# Altium PCB GCM_PCB.PcbDoc
Units mm, origin at the board's own origin, x right, y up, seen from the top; angles counter-clockwise.
Board outline 60 x 96 mm, 2 copper layers (Top Layer, Bottom Layer); 63 components, 57 nets, 301 pads, 0 vias.
Unrouted connection lines stored in the file: 174.
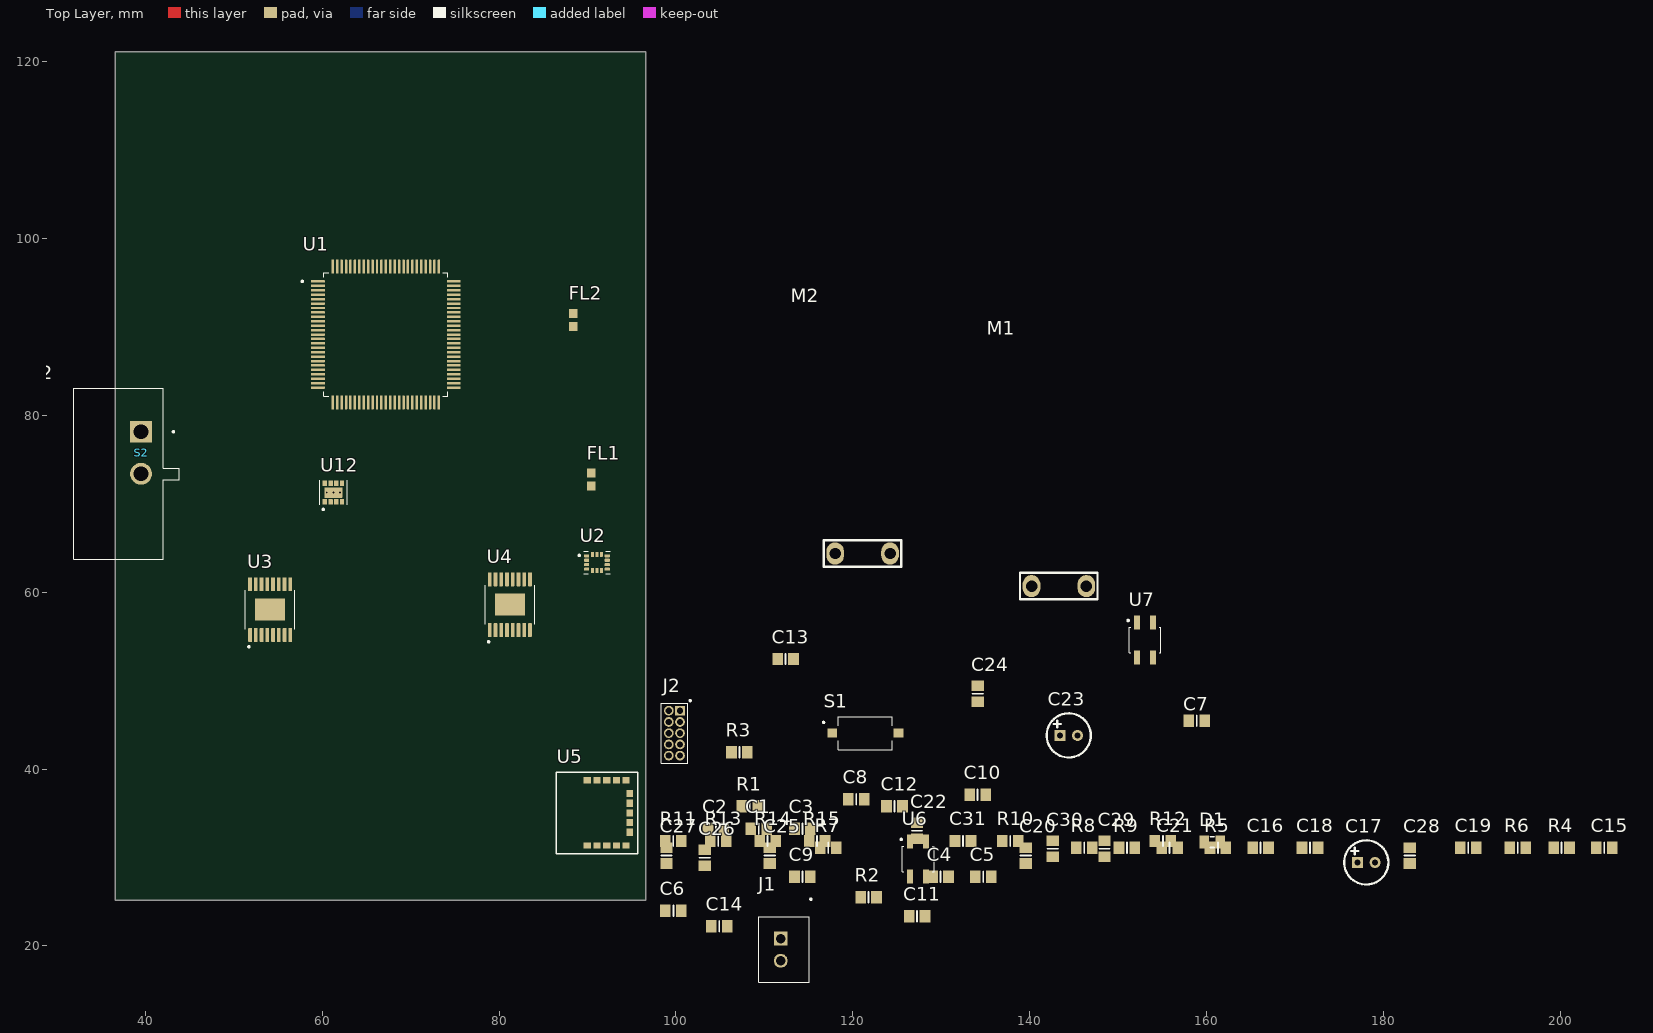
[diagram p0: Top Layer view]
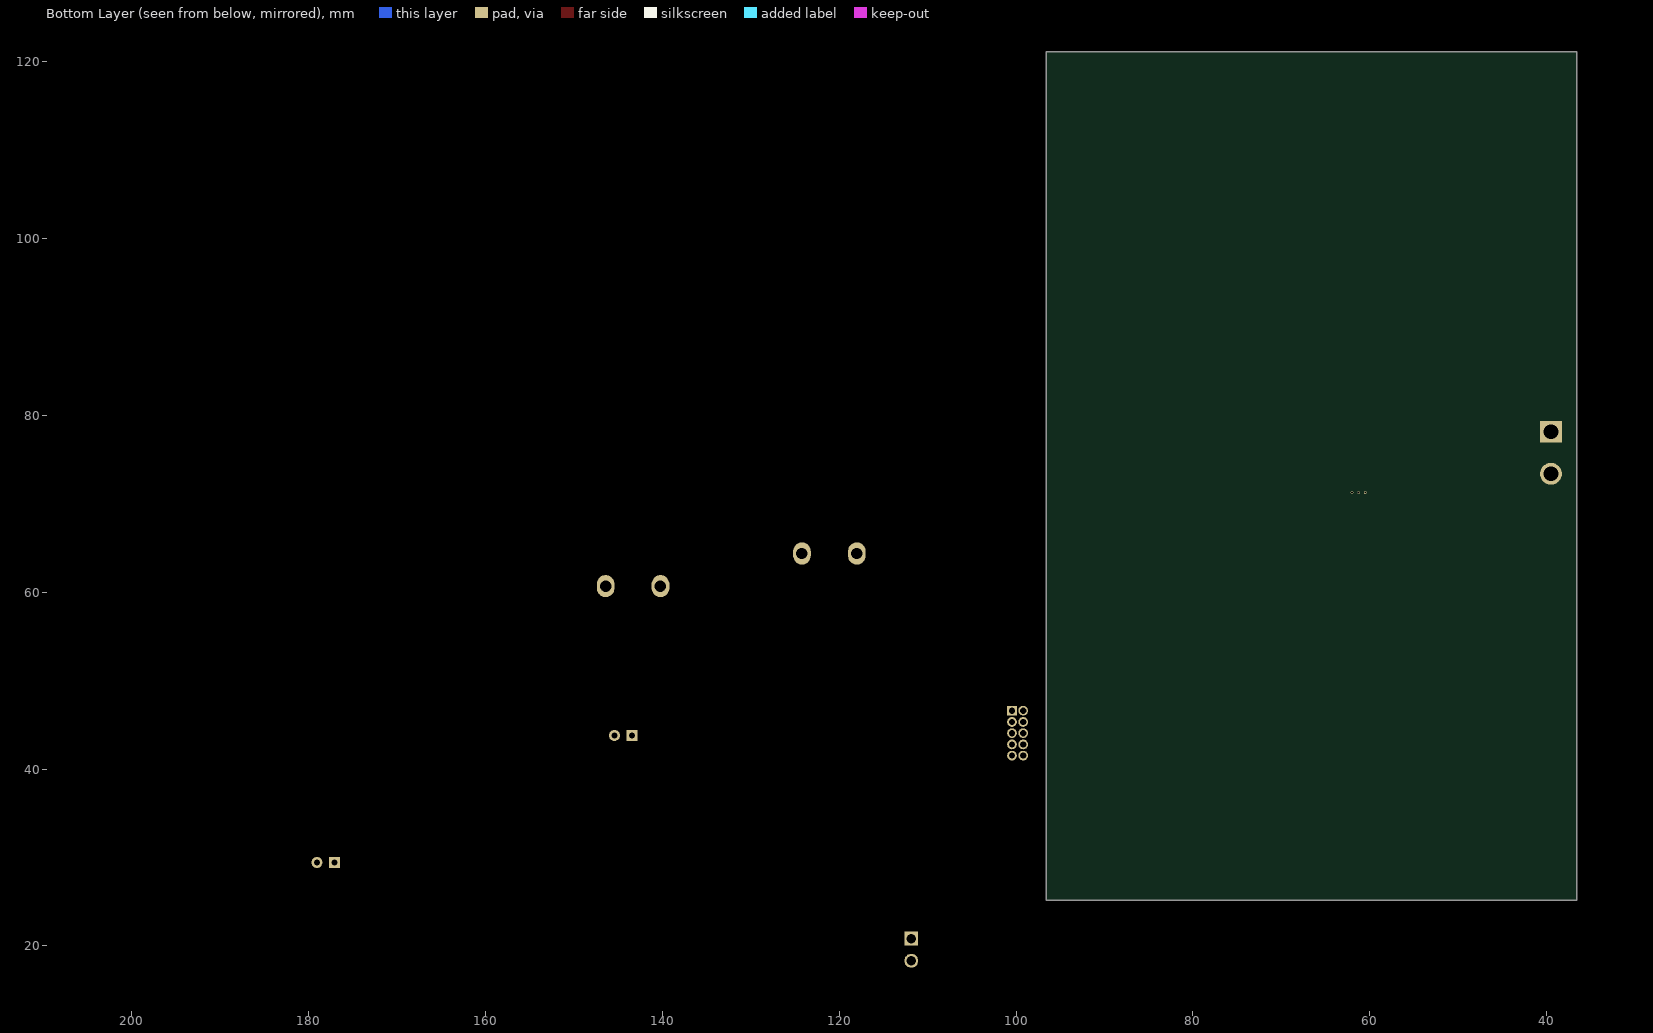
[diagram p1: Bottom Layer view, seen from below]

## Layer stack, top to bottom
Top Solder: solder mask 0.0102, Solder Resist, Dk 3.5
Top Layer: signal copper 0.0356
Dielectric 1: dielectric 0.32, FR-4, Dk 4.8
Bottom Layer: signal copper 0.0356
Bottom Solder: solder mask 0.0102, Solder Resist, Dk 3.5

## Board outline
36.576,25.146 36.576,121.146 96.576,121.146 96.576,25.146

## Design rules (kind name [scope] priority, off if disabled: settings)
Clearance [All] p1: gap=0.15 ignorepadtopadclearanceinfootprint=FALSE
PolygonConnect [All] p1: connectstyle=Relief reliefconductorwidth=0.254 reliefentries=4 polygonreliefangle="90 Angle" airgapwidth=0.254
RoutingVias [All] p1: holewidth=0.711 width=1.27 viastyle="Through Hole" minholewidth=0.711 minwidth=1.27 maxholewidth=0.711 maxwidth=1.27
SolderMaskExpansion [All] p1: expansion=0.102 istentingtop=FALSE
Width [All] p1: maxlimit=0.254 minlimit=0.254 preferedwidth=0.254
30 further rules are at their usual default settings.

## Components (designator, comment, footprint, x,y, rotation, side; value= is the part's Value field where it differs from the comment)
C1 "100nF" "CAPACITOR TANTALIO" 109.347,33.274 r0 top
C2 "1uF" "CAPACITOR TANTALIO" 104.521,33.274 r0 top
C3 "100nF" "CAPACITOR TANTALIO" 114.3,33.274 r0 top
C4 "2.2uF" "CAPACITOR TANTALIO" 129.921,27.813 r0 top
C5 "2.2uF" "CAPACITOR TANTALIO" 134.747,27.813 r0 top
C6 "100nF" "CAPACITOR TANTALIO" 99.706,24.003 r0 top
C7 "100nF" "CAPACITOR TANTALIO" 158.888,45.466 r0 top
C8 "100nF" "CAPACITOR TANTALIO" 120.385,36.576 r0 top
C9 "100nF" "CAPACITOR TANTALIO" 114.3,27.813 r0 top
C10 "100nF" "CAPACITOR TANTALIO" 134.112,37.084 r0 top
C11 "4.7uF" "CAPACITOR TANTALIO" 127.265,23.368 r0 top
C12 "3.3uF" "CAPACITOR TANTALIO" 124.714,35.814 r0 top
C13 "10uF" "CAPACITOR TANTALIO" 112.395,52.451 r0 top
C14 "22uF" "CAPACITOR TANTALIO" 104.891,22.225 r0 top
C15 "22nF" "CAPACITOR TANTALIO" 204.978,31.115 r0 top
C16 "100nF" "CAPACITOR TANTALIO" 166.116,31.115 r0 top
C17 "100 uF/16V" "Cap El 10uF" 115.57,91.948 r0 top
C18 "100nF" "CAPACITOR TANTALIO" 171.704,31.115 r0 top
C19 "100nF" "CAPACITOR TANTALIO" 189.611,31.115 r0 top
C20 "100nF" "CAPACITOR TANTALIO" 139.573,30.226 r90 top
C21 "22nF" "CAPACITOR TANTALIO" 155.829,31.115 r0 top
C22 "100nF" "CAPACITOR TANTALIO" 127.254,33.031 r90 top
C23 "100 uF/16V" "Cap El 10uF" 81.915,106.315 r0 top
C24 "100nF" "CAPACITOR TANTALIO" 134.112,48.525 r90 top
C25 "100nF" "CAPACITOR TANTALIO" 110.617,30.226 r90 top
C26 "2.2uF" "CAPACITOR TANTALIO" 103.251,29.972 r90 top
C27 "10nF" "CAPACITOR TANTALIO" 98.933,30.226 r90 top
C28 "100nF" "CAPACITOR TANTALIO" 183.007,30.226 r90 top
C29 "100nF" "CAPACITOR TANTALIO" 148.463,30.988 r90 top
C30 "10uF" "CAPACITOR TANTALIO" 142.621,30.988 r90 top
C31 "100nF" "CAPACITOR TANTALIO" 132.461,31.877 r0 top
D1 "LED" "LED SMD" 160.655,31.75 r0 top
FL1 "BLM18AG601SN1D" BEADC1608X95N 90.424,72.744 r90 top
FL2 "BLM18AG601SN1D" BEADC1608X95N 88.392,90.805 r90 top
J1 "Bateria" JST_B2B-XH-A 111.321,19.578 r90 top
J2 "SWD/USART" AMPHENOL_20021311-00026T4LF 99.822,38.989 r90 top
M1 "Faulhaber" MOTOR 143.256,62.23 r0 top
M2 "Faulhaber" MOTOR 121.054,65.913 r0 top
R1 "47kΩ" "RESISTENCIA SMD" 108.331,35.814 r0 top value=3KΩ
R2 "14.7kΩ" "RESISTENCIA SMD" 121.782,25.527 r0 top value=3KΩ
R3 "4.7kΩ" "RESISTENCIA SMD" 107.177,41.91 r0 top value=3KΩ
R4 "5.5kΩ" "RESISTENCIA SMD" 200.152,31.115 r0 top value=3KΩ
R5 "10kΩ" "RESISTENCIA SMD" 161.29,31.115 r0 top value=3KΩ
R6 "100Ω" "RESISTENCIA SMD" 195.199,31.115 r0 top value=3KΩ
R7 "10kΩ" "RESISTENCIA SMD" 117.221,31.115 r0 top value=3KΩ
R8 "100Ω" "RESISTENCIA SMD" 146.177,31.115 r0 top value=3KΩ
R9 "5.5kΩ" "RESISTENCIA SMD" 151.003,31.115 r0 top value=3KΩ
R10 "100kΩ" "RESISTENCIA SMD" 137.795,31.877 r0 top value=3KΩ
R11 "150Ω" "RESISTENCIA SMD" 99.695,31.877 r0 top value=3KΩ
R12 "1kΩ" "RESISTENCIA SMD" 155.067,31.877 r0 top value=3KΩ
R13 "3.3kΩ" "RESISTENCIA SMD" 104.775,31.877 r0 top value=3KΩ
R14 "150Ω" "RESISTENCIA SMD" 110.363,31.877 r0 top value=3KΩ
R15 "3.3kΩ" "RESISTENCIA SMD" 115.951,31.877 r0 top value=3KΩ
S1 "BOOT" SW_TS09-63-25-WT-160-SMT-TR 121.412,44.069 r0 top
S2 "ON/OFF" SW_L101011ML04Q 36.957,73.406 r270 top
U1 "STM32H743VIT6" QFP50P1600X1600X160-100N 67.183,89.154 r0 top
U2 "ICM-42688-P" PQFN50P300X250X97-14N 91.059,63.373 r0 top
U3 "DRV8874PWPR" SOP65P640X120-17N 54.102,58.039 r90 top
U4 "DRV8874PWPR" SOP65P640X120-17N 81.209,58.598 r90 top
U5 "E104-BT5005A" MOD15_E104-BT5005A_BYT 91.059,35.052 r90 top
U6 "QRE1113GR" SOIC180P460X187-4N 127.381,29.845 r0 top
U7 "QRE1113GR" SOIC180P460X187-4N 153.035,54.61 r0 top
U12 "TPS82130SILT" CONV_TPS82140SILR 61.255,71.281 r90 top

## Footprints (in the part's own frame and the unit in brackets; to place one, negate y for a bottom-side part, rotate by r counter-clockwise, add the part's x,y. Pads: shape width x height; smd on the part's side, far side on the other; paste and mask are expansions set on the pad)
AMPHENOL_20021311-00026T4LF [mm]
  rect 1.1x1.1 / inner round 1.1 / far side rect 1.1x1.1 hole 0.7: 1(7.62,-0.635)
  round 1.1 hole 0.7: 2(7.62,0.635) 3(6.35,-0.635) 4(6.35,0.635) 5(5.08,-0.635) 6(5.08,0.635) 7(3.81,-0.635) 8(3.81,0.635) 9(2.54,-0.635) 10(2.54,0.635)
  silkscreen extent 1.65,-1.88 8.86,1.5
BEADC1608X95N [mm]
  rect 1x0.97 smd: 1(-0.735,0) 2(0.735,0)
  body extent -0.8,-0.4 0.8,0.4, height 0.95
"Cap El 10uF" [mm]
  rect 1.25x1.25 hole 0.7: 1(61.5,-62.5)
  round 1.25 hole 0.7: 2(63.5,-62.5)
  silkscreen extent 60,-65 65,-60, body extent 60.01,-64.98 65.01,-59.99, height 1.27
"CAPACITOR TANTALIO" [mm]
  rect 1.2x1.4 smd: 1(-0.9,0) 2(0.9,0)
  silkscreen extent 0,-0.6 0,0.6, body extent -1.59,-0.79 1.61,0.81, height 1.8
CONV_TPS82140SILR [mm]
  rrect5% 0.6x0.5 smd paste-1 mask+0: 1(-1.05,0.975) 2(-1.05,0.325) 3(-1.05,-0.325) 4(-1.05,-0.975) 5(1.05,-0.975) 6(1.05,-0.325) 7(1.05,0.325) 8(1.05,0.975)
  rrect5% 1.2x2 smd paste-2 mask+0: 9(0,0)
  round 0.3 hole 0.2 mask+0: 10(0,0.75) 11(0,0) 12(0,-0.75)
  silkscreen extent -2,-1.55 1.4,1.55, body extent -1.5,-1.4 1.5,1.4, height 1.53
JST_B2B-XH-A [mm]
  rect 1.575x1.575 / inner round 1.575 / far side rect 1.575x1.575 hole 1.05: 1(1.25,-0.525)
  round 1.575 hole 1.05: 2(-1.25,-0.525)
  silkscreen extent -3.7,-4.04 5.81,1.99, body extent -3.68,-4.06 3.72,1.69, height 7
"LED SMD" [mm] "0805"
  rect 1.1x1.45 smd: A(0.9,0) C(-0.9,0)
  silkscreen extent -0.2,-0.6 0.2,0.6, body extent -0.95,-0.65 1.05,0.6, height 0.7
MOD15_E104-BT5005A_BYT [mil]
  rect 28x32 smd paste+0 mask+0: 1(-145.67,43.31) 2(-145.67,0) 3(-145.67,-43.31) 4(-145.67,-86.61) 5(-145.67,-129.92) 11(145.67,-129.92) 12(145.67,-86.61) 13(145.67,-43.31) 14(145.67,0) 15(145.67,43.31)
  rect 32x28 smd paste+0 mask+0: 6(-86.61,-145.67) 7(-43.31,-145.67) 8(0,-145.67) 9(43.31,-145.67) 10(86.61,-145.67)
  silkscreen extent -182,-182 182,182
MOTOR [mm]
  oval 2x2.5 hole 1.3: 1(-3.048,-1.524) 2(3.152,-1.524)
  silkscreen extent -4.35,-3.03 4.43,-0.03, body extent -8.36,-3.17 8.61,26.12, height 8.5
PQFN50P300X250X97-14N [mm]
  rrect50% 0.59x0.35 smd mask+0: 1(-1.165,0.75) 2(-1.165,0.25) 3(-1.165,-0.25) 4(-1.165,-0.75) 8(1.165,-0.75) 9(1.165,-0.25) 10(1.165,0.25) 11(1.165,0.75)
  rrect50% 0.35x0.59 smd mask+0: 5(-0.5,-0.915) 6(0,-0.915) 7(0.5,-0.915) 12(0.5,0.915) 13(0,0.915) 14(-0.5,0.915)
  silkscreen extent -2.1,-1.25 1.5,1.25
QFP50P1600X1600X160-100N [mm]
  rrect25% 1.56x0.28 smd: 1(-7.68,6) 2(-7.68,5.5) 3(-7.68,5) 4(-7.68,4.5) 5(-7.68,4) 6(-7.68,3.5) 7(-7.68,3) 8(-7.68,2.5) 9(-7.68,2) 10(-7.68,1.5) 11(-7.68,1) 12(-7.68,0.5) 13(-7.68,0) 14(-7.68,-0.5) 15(-7.68,-1) 16(-7.68,-1.5) 17(-7.68,-2) 18(-7.68,-2.5) 19(-7.68,-3) 20(-7.68,-3.5) 21(-7.68,-4) 22(-7.68,-4.5) 23(-7.68,-5) 24(-7.68,-5.5) 25(-7.68,-6) 51(7.68,-6) 52(7.68,-5.5) 53(7.68,-5) 54(7.68,-4.5) 55(7.68,-4) 56(7.68,-3.5) 57(7.68,-3) 58(7.68,-2.5) 59(7.68,-2) 60(7.68,-1.5) 61(7.68,-1) 62(7.68,-0.5) 63(7.68,0) 64(7.68,0.5) 65(7.68,1) 66(7.68,1.5) 67(7.68,2) 68(7.68,2.5) 69(7.68,3) 70(7.68,3.5) 71(7.68,4) 72(7.68,4.5) 73(7.68,5) 74(7.68,5.5) 75(7.68,6)
  rrect25% 0.28x1.56 smd: 26(-6,-7.68) 27(-5.5,-7.68) 28(-5,-7.68) 29(-4.5,-7.68) 30(-4,-7.68) 31(-3.5,-7.68) 32(-3,-7.68) 33(-2.5,-7.68) 34(-2,-7.68) 35(-1.5,-7.68) 36(-1,-7.68) 37(-0.5,-7.68) 38(0,-7.68) 39(0.5,-7.68) 40(1,-7.68) 41(1.5,-7.68) 42(2,-7.68) 43(2.5,-7.68) 44(3,-7.68) 45(3.5,-7.68) 46(4,-7.68) 47(4.5,-7.68) 48(5,-7.68) 49(5.5,-7.68) 50(6,-7.68) 76(6,7.68) 77(5.5,7.68) 78(5,7.68) 79(4.5,7.68) 80(4,7.68) 81(3.5,7.68) 82(3,7.68) 83(2.5,7.68) 84(2,7.68) 85(1.5,7.68) 86(1,7.68) 87(0.5,7.68) 88(0,7.68) 89(-0.5,7.68) 90(-1,7.68) 91(-1.5,7.68) 92(-2,7.68) 93(-2.5,7.68) 94(-3,7.68) 95(-3.5,7.68) 96(-4,7.68) 97(-4.5,7.68) 98(-5,7.68) 99(-5.5,7.68) 100(-6,7.68)
  silkscreen extent -9.54,-7 7,7, body extent -8,-8 8,8, height 1.6
"RESISTENCIA SMD" [mm] "0805"
  rect 1.2x1.4 smd: 1(-0.9,0) 2(0.9,0)
  silkscreen extent 0,-0.6 0,0.6, body extent -1,-0.61 1,0.64, height 0.6
SOIC180P460X187-4N [mm]
  rect 0.69x1.57 smd: 1(-0.9,1.975) 2(-0.9,-1.975) 3(0.9,-1.975) 4(0.9,1.975)
  silkscreen extent -2,-1.45 1.8,2.3, body extent -1.7,-2.3 1.7,2.3, height 1.87
SOP65P640X120-17N [mm]
  rrect25% 1.57x0.41 smd: 1(-2.87,2.275) 2(-2.87,1.625) 3(-2.87,0.975) 4(-2.87,0.325) 5(-2.87,-0.325) 6(-2.87,-0.975) 7(-2.87,-1.625) 8(-2.87,-2.275) 9(2.87,-2.275) 10(2.87,-1.625) 11(2.87,-0.975) 12(2.87,-0.325) 13(2.87,0.325) 14(2.87,0.975) 15(2.87,1.625) 16(2.87,2.275)
  rect 2.48x3.4 smd paste-3: 17(0,0)
  silkscreen extent -4.3,-2.8 2.2,2.8, body extent -3.2,-2.5 3.2,2.5, height 1.2
SW_L101011ML04Q [mm]
  rect 2.475x2.475 / inner round 2.475 / far side rect 2.475x2.475 hole 1.65: 1(-4.75,2.54)
  round 2.475 hole 1.65: 2(0,2.54)
  silkscreen extent -9.65,-5.08 9.65,6.86, body extent -9.65,-10.29 9.65,6.73, height 10.46
SW_TS09-63-25-WT-160-SMT-TR [mm]
  rect 1.1x1 smd: 1(-3.75,0) 2(3.75,0)
  silkscreen extent -4.82,-1.85 3.05,1.85, body extent -4.05,-1.85 4.05,1.85, height 2.5

## Part data
C1 C2 C3 C4 C5 C6 C7 C8 C9 C10 C11 C12 C13 C14 C15 C16 C18 C19 C20 C21 C22 C24 C25 C26 C27 C28 C29 C30 C31: library part "CAPACITOR TANTALIO", "0805", Package="0603 Murata", Digi-Key_Part_Number=490-13230-1-ND, DigiKey-Purchase-URL=https://snapeda.com/shop?store=DigiKey&id=1181520, MF=Murata, Mouser-Purchase-URL=https://snapeda.com/shop?store=Mouser&id=1181520, MP=GRM035R60J475ME15D, SnapEDA_Link=https://www.snapeda.com/parts/GRM035R60J475ME15D/Murata%20Electronics%20North%20America/view-part/1181520/?ref=snap
C17 C23: library part "Cap el 10 uF"
D1: library part "LED SMD", "0805", Package=None, Availability=Unavailable, MP=597-5311-402F, Price=None
FL1 FL2: "600 Ohms @ 100 MHz 1 - Ferrite Bead 0603 (1608 Metric) 500mA 380mOhm", Package="1608 Murata", Availability="In Stock", Check_prices=https://www.snapeda.com/parts/BLM18AG601SN1D/Murata/view-part/?ref=eda, MF=Murata, MP=BLM18AG601SN1D, Price=None, Purchase-URL=https://pricing.snapeda.com/search/part/BLM18AG601SN1D/?ref=eda, SnapEDA_Link=https://www.snapeda.com/parts/BLM18AG601SN1D/Murata/view-part/?ref=snap
J1: library part B2B-XH-A, Package=None, Availability=Unavailable, MF="{'manufacturer': u'JST Sales America Inc.'}", MP=B2B-XH-A, Price=None
J2: library part 20021311-00026T4LF, Package=None, Availability=Unavailable, MF="Amphenol ICC", MP=20021311-00026T4LF, Price=None
R1 R2 R3 R4 R5 R6 R7 R8 R9 R10 R11 R12 R13 R14 R15: library part RESISTENCIA, "0805", LatestRevisionDate=17-Jul-2002, LatestRevisionNote="Re-released for DXP Platform.", PackageDescription="Axial Device, Thru-Hole; 2 Leads; 0.3 in Pin Spacing", PackageReference=AXIAL-0.3, Published=8-Jun-2000, Publisher="Altium Limited"
S1: library part TS09-63-25-WT-160-SMT-TR, "6.1 x 3.7 mm, 2.5 mm Actuator Height, 160 gf, White, Surface Mount, SPST, Tactile Switch", Package=None, Check_prices=https://www.snapeda.com/parts/TS09-63-25-WT-160-SMT-TR/Same+Sky/view-part/?ref=eda, MF="Same Sky", MP=TS09-63-25-WT-160-SMT-TR, SnapEDA_Link=https://www.snapeda.com/parts/TS09-63-25-WT-160-SMT-TR/Same+Sky/view-part/?ref=snap
S2: library part L101011ML04Q, "Switch Slide ON OFF SPST Side Slide 4A 250VAC 125VDC PC Pins Thru-Hole Bulk", Package=None, Check_prices=https://www.snapeda.com/parts/L101011ML04Q/C%2526K/view-part/?ref=eda, MF=C&K, MP=L101011ML04Q, SnapEDA_Link=https://www.snapeda.com/parts/L101011ML04Q/C%2526K/view-part/?ref=snap
U1: "ARMÂ® CortexÂ®-M7 STM32H7 Microcontroller IC 32-Bit Single-Core 480MHz 2MB (2M x 8) FLASH 100-LQFP (14x14)", Package="LQFP-100 STMicroelectronics", Check_prices=https://www.snapeda.com/parts/STM32H743VIT6/STMicroelectronics/view-part/?ref=eda, MF=STMicroelectronics, MP=STM32H743VIT6, SnapEDA_Link=https://www.snapeda.com/parts/STM32H743VIT6/STMicroelectronics/view-part/?ref=snap
U2: "Accelerometer, Gyroscope, 6 Axis Sensor Output", Package=None, Availability=Unavailable, MP=ICM-42688-P, Price=None
U3 U4: "40-V, 6-A H-bridge motor driver with integrated current sensing feedback", Package="HTSSOP-16 Texas Instruments", Check_prices=https://www.snapeda.com/parts/DRV8874PWPR/Texas+Instruments/view-part/?ref=eda, MF="Texas Instruments", MP=DRV8874PWPR, SnapEDA_Link=https://www.snapeda.com/parts/DRV8874PWPR/Texas+Instruments/view-part/?ref=snap
U5: "No Description Available", Manufacturer_Name="Chengdu Ebyte Elec Tech", Copyright="Copyright (C) 2026 Ultra Librarian. All rights reserved.", Manufacturer_Part_Number=E104-BT5005A, RefDes=RefDes, Type=RF
U6 U7: "Reflective Optical Sensor 0.039 (1mm) 4-SMD, Gull Wing", Package="ARUSM-313-4 ON Semiconductor", Availability="In Stock", Check_prices=https://www.snapeda.com/parts/QRE1113GR/Onsemi/view-part/?ref=eda, MF="ON Semiconductor", MP=QRE1113GR, Price=None, Purchase-URL=https://pricing.snapeda.com/search/part/QRE1113GR/?ref=eda, SnapEDA_Link=https://www.snapeda.com/parts/QRE1113GR/Onsemi/view-part/?ref=snap
U12: "Non-Isolated PoL Module DC DC Converter 1 Output 0.9 ~ 5V - - - 3A 3V - 17V Input", Package=None, Check_prices=https://www.snapeda.com/parts/TPS82130SIL/Texas+Instruments/view-part/?ref=eda, MF="Texas Instruments", MP=TPS82130SIL, SnapEDA_Link=https://www.snapeda.com/parts/TPS82130SIL/Texas+Instruments/view-part/?ref=snap
M1 M2: LatestRevisionDate=17-Jul-2002, LatestRevisionNote="Re-released for DXP Platform.", Publisher="Altium Limited"

## Nets (pads, with @x,y where several pads share a name; then routed paths per layer and width w, separated by ;. In a path a pad name is that pad's centre, name@x,y a point inside that pad or via, vN(x,y) a via of type N, cw(c..) or ccw(c..) an arc to the next point about the centre after c; other vN are vias at no path point)
BAT: J1.1 S2.2
BOOT0: R1.2 S1.1 U1.94
CS: U1.92 U2.12
"DAC M1": R6.2 U1.28
"DAC M2": R8.2 U1.29
DATA: U1.65 U5.15
"DIR M1": U1.40 U3.2
"DIR M2": U1.42 U4.2
DISC: U1.66 U5.6
FB: R2.1 R3.2 U12.6
GND: C1.2 C2.2 C3.1 C4.1 C5.1 C6.1 C7.1 C8.1 C9.1 C10.1 C11.2 C12.1 C13.1 C14.1 C16.1 C17.2 C19.1 C20.1 C22.1 C23.2 C25.1 C26.1 C27.1 C28.2 C29.1 C30.1 C31.1 J1.2 J2.6 J2.8 J2.10 R1.1 R3.1 R4.1 R9.1 U1.10 U1.19 U1.26 U1.49 U1.74 U1.99 U2.2 U2.3 U2.6 U2.7 U2.9 U2.10 U2.11 U3.7 U3.9 U3.15 U3.16 U4.7 U4.9 U4.15 U4.16 U5.5 U5.14 U6.2 U6.4 U7.2 U7.4 U12.3 U12.9 U12.10 U12.11 U12.12
"INT1 IMU": U1.87 U2.4
"IPROPI M1": R4.2 U1.15 U3.6
"IPROPI M2": R9.2 U1.16 U4.6
"IR1 FLOOR": R13.2 U1.32 U7.3
"IR2 FLOOR": R15.2 U1.33 U6.3
"MODE BT": U1.64 U5.9
NetC1_1: C1.1 C2.1 FL1.1 U1.20 U1.21
NetC12_2: C12.2 U12.8
NetC15_1: C15.1 U3.14
NetC15_2: C15.2 U3.13
NetC21_1: C21.1 U4.14
NetC21_2: C21.2 U4.13
NetC25_2: C25.2 C26.2 FL2.1 U2.8
NetD1_C: D1.C U5.13
NetM1_1: M1.1 U3.8
NetM1_2: M1.2 U3.10
NetM2_1: M2.1 U4.8
NetM2_2: M2.2 U4.10
NetR11_2: R11.2 U7.1
NetR14_2: R14.2 U6.1
"NFAULT M1": R5.2 U1.81 U3.4
"NFAULT M2": R7.2 U1.82 U4.4
NRST: C28.1 J2.4 U1.14
NSLEEP: U1.43 U3.3 U4.3
"PWM M1": U1.39 U3.1
"PWM M2": U1.41 U4.1
"RST BT": C31.2 R10.2 U1.2 U5.3
RX: J2.9 U1.69
"RX BT": U1.55 U5.11
SCLK: U1.52 U2.13
SDI: U1.54 U2.14
SDO: U1.53 U2.1
SWCLK: J2.5 U1.76
SWDIO: J2.3 U1.72
SWO: J2.2 U1.89
TX: J2.7 U1.68
"TX BT": U1.56 U5.12
VCAP1: C4.2 U1.48
VCAP2: C5.2 U1.73
"VCC BT": C3.2 C6.2 C7.2 C8.2 C9.2 C10.2 C11.1 C14.2 C27.2 C29.2 C30.2 FL1.2 FL2.2 J2.1 R2.2 R5.1 R7.1 R10.1 R11.1 R12.2 R13.1 R14.1 R15.1 S1.2 U1.6 U1.11 U1.27 U1.50 U1.75 U1.100 U2.5 U5.4 U12.4
"VCP M1": C18.2 U3.12
"VCP M2": C24.2 U4.12
VM: C13.2 C16.2 C17.1 C22.2 C23.1 S2.1 U3.11 U4.11 U12.1 U12.2
"VREF M1": C19.2 R6.1 U3.5
"VREF M2": C20.2 R8.1 U4.5
W/S: U1.63 U5.7
pads on no net: C18.1 C24.1 D1.A R12.1 U1.1 U1.3 U1.4 U1.5 U1.7 U1.8 U1.9 U1.12 U1.13 U1.17 U1.18 U1.22 U1.23 U1.24 U1.25 U1.30 U1.31 U1.34 U1.35 U1.36 U1.37 U1.38 U1.44 U1.45 U1.46 U1.47 U1.51 U1.57 U1.58 U1.59 U1.60 U1.61 U1.62 U1.67 U1.70 U1.71 U1.77 U1.78 U1.79 U1.80 U1.83 U1.84 U1.85 U1.86 U1.88 U1.90 U1.91 U1.93 U1.95 U1.96 U1.97 U1.98 U3.17 U4.17 U5.1 U5.2 U5.8 U5.10 U12.5 U12.7